# Altium PCB PCB1.PcbDoc
Units mm, origin at the board's own origin, x right, y up, seen from the top; angles counter-clockwise.
Board outline 51.41 x 51 mm, 2 copper layers (Top Layer, Bottom Layer); 43 components, 43 nets, 151 pads, 77 vias.
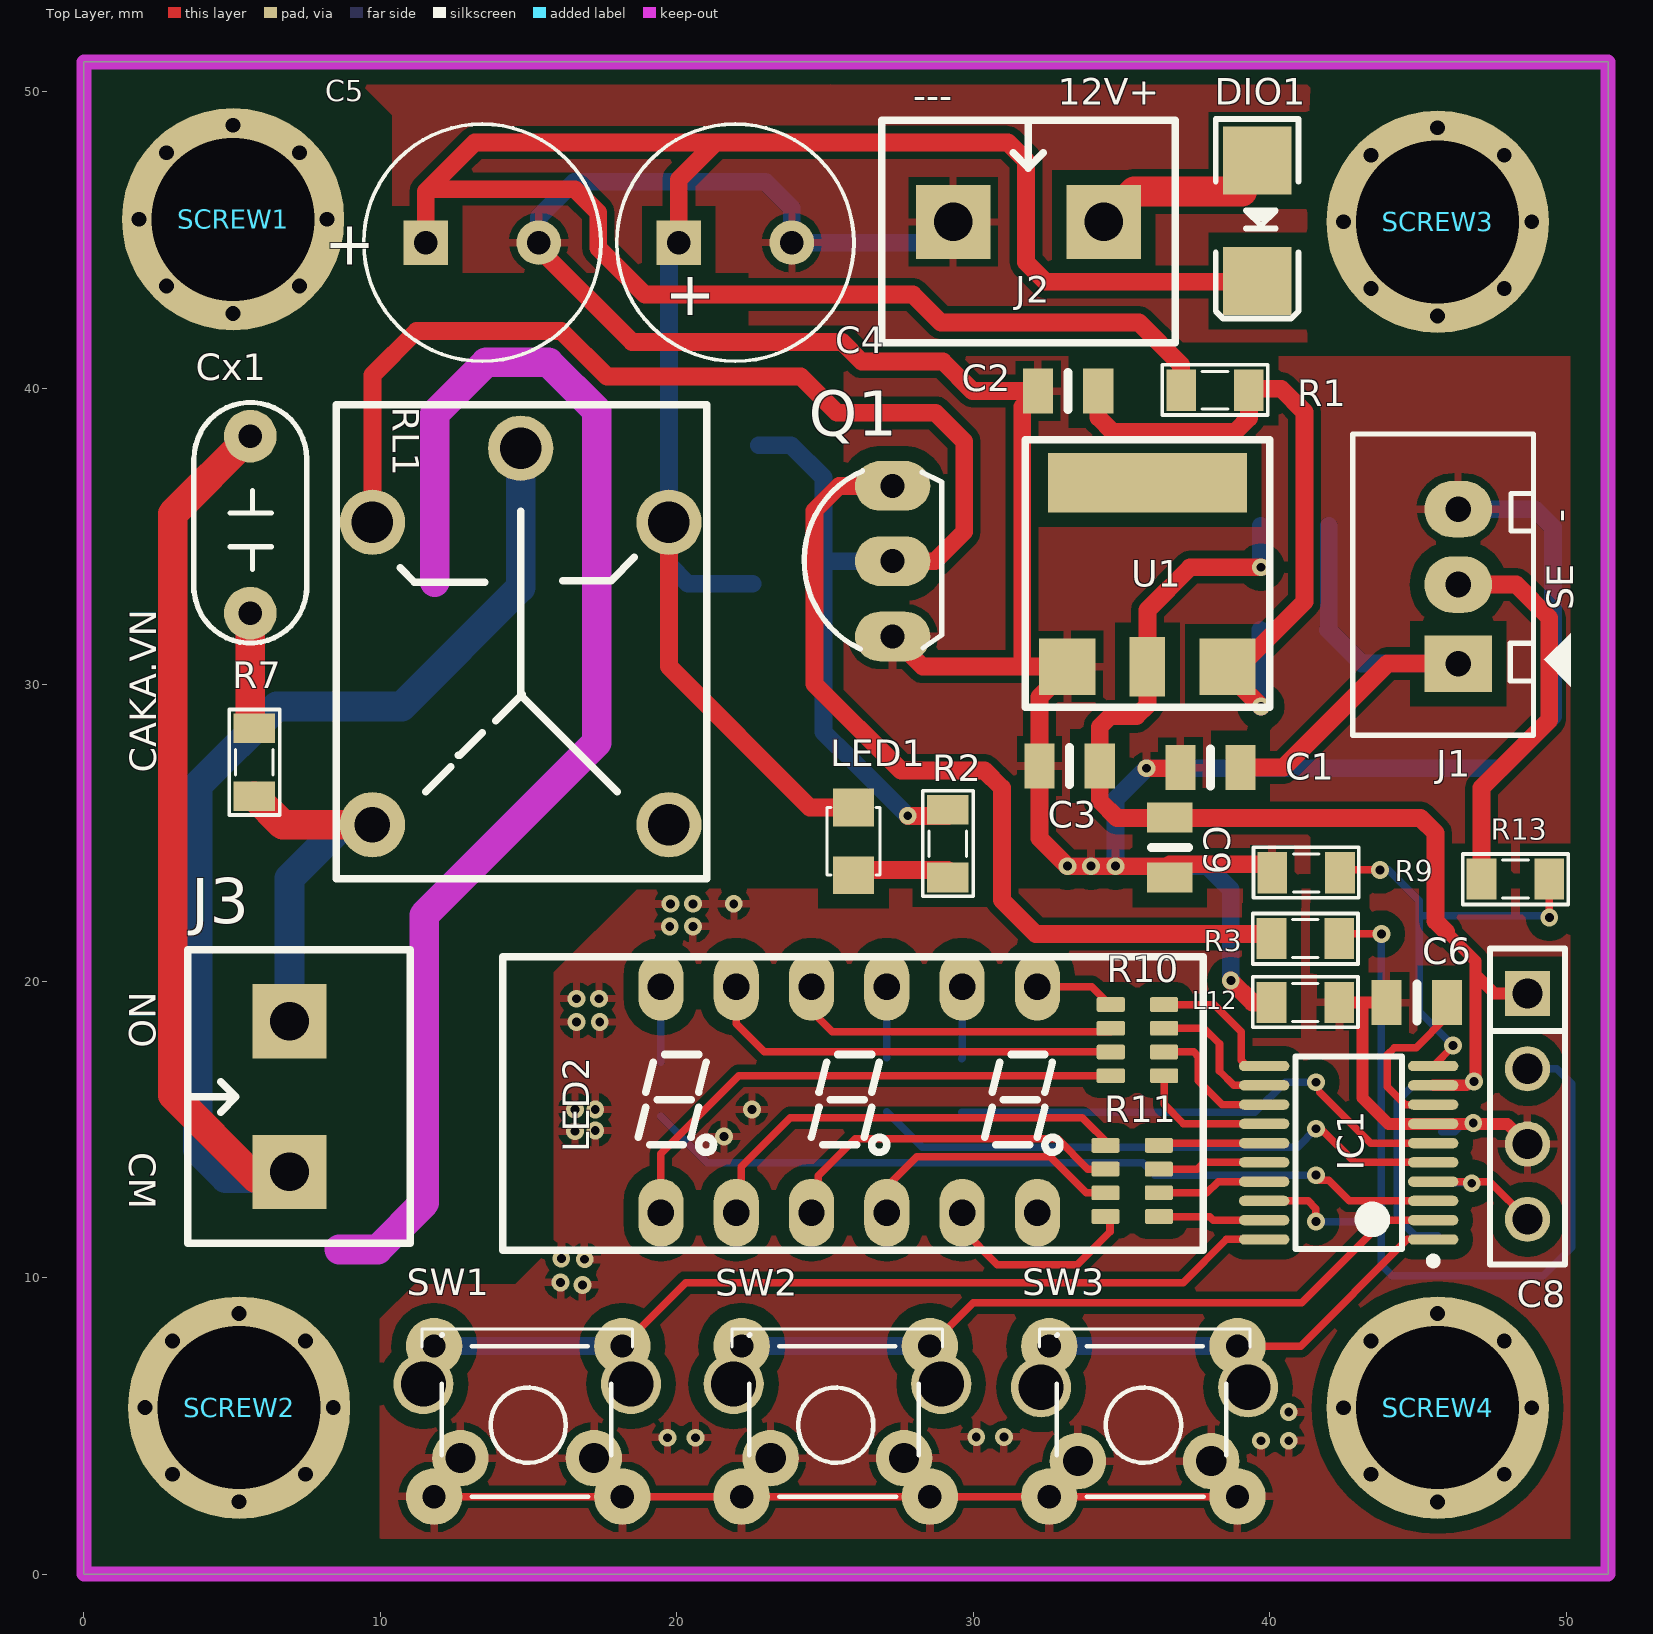
[diagram p0: Top Layer view]
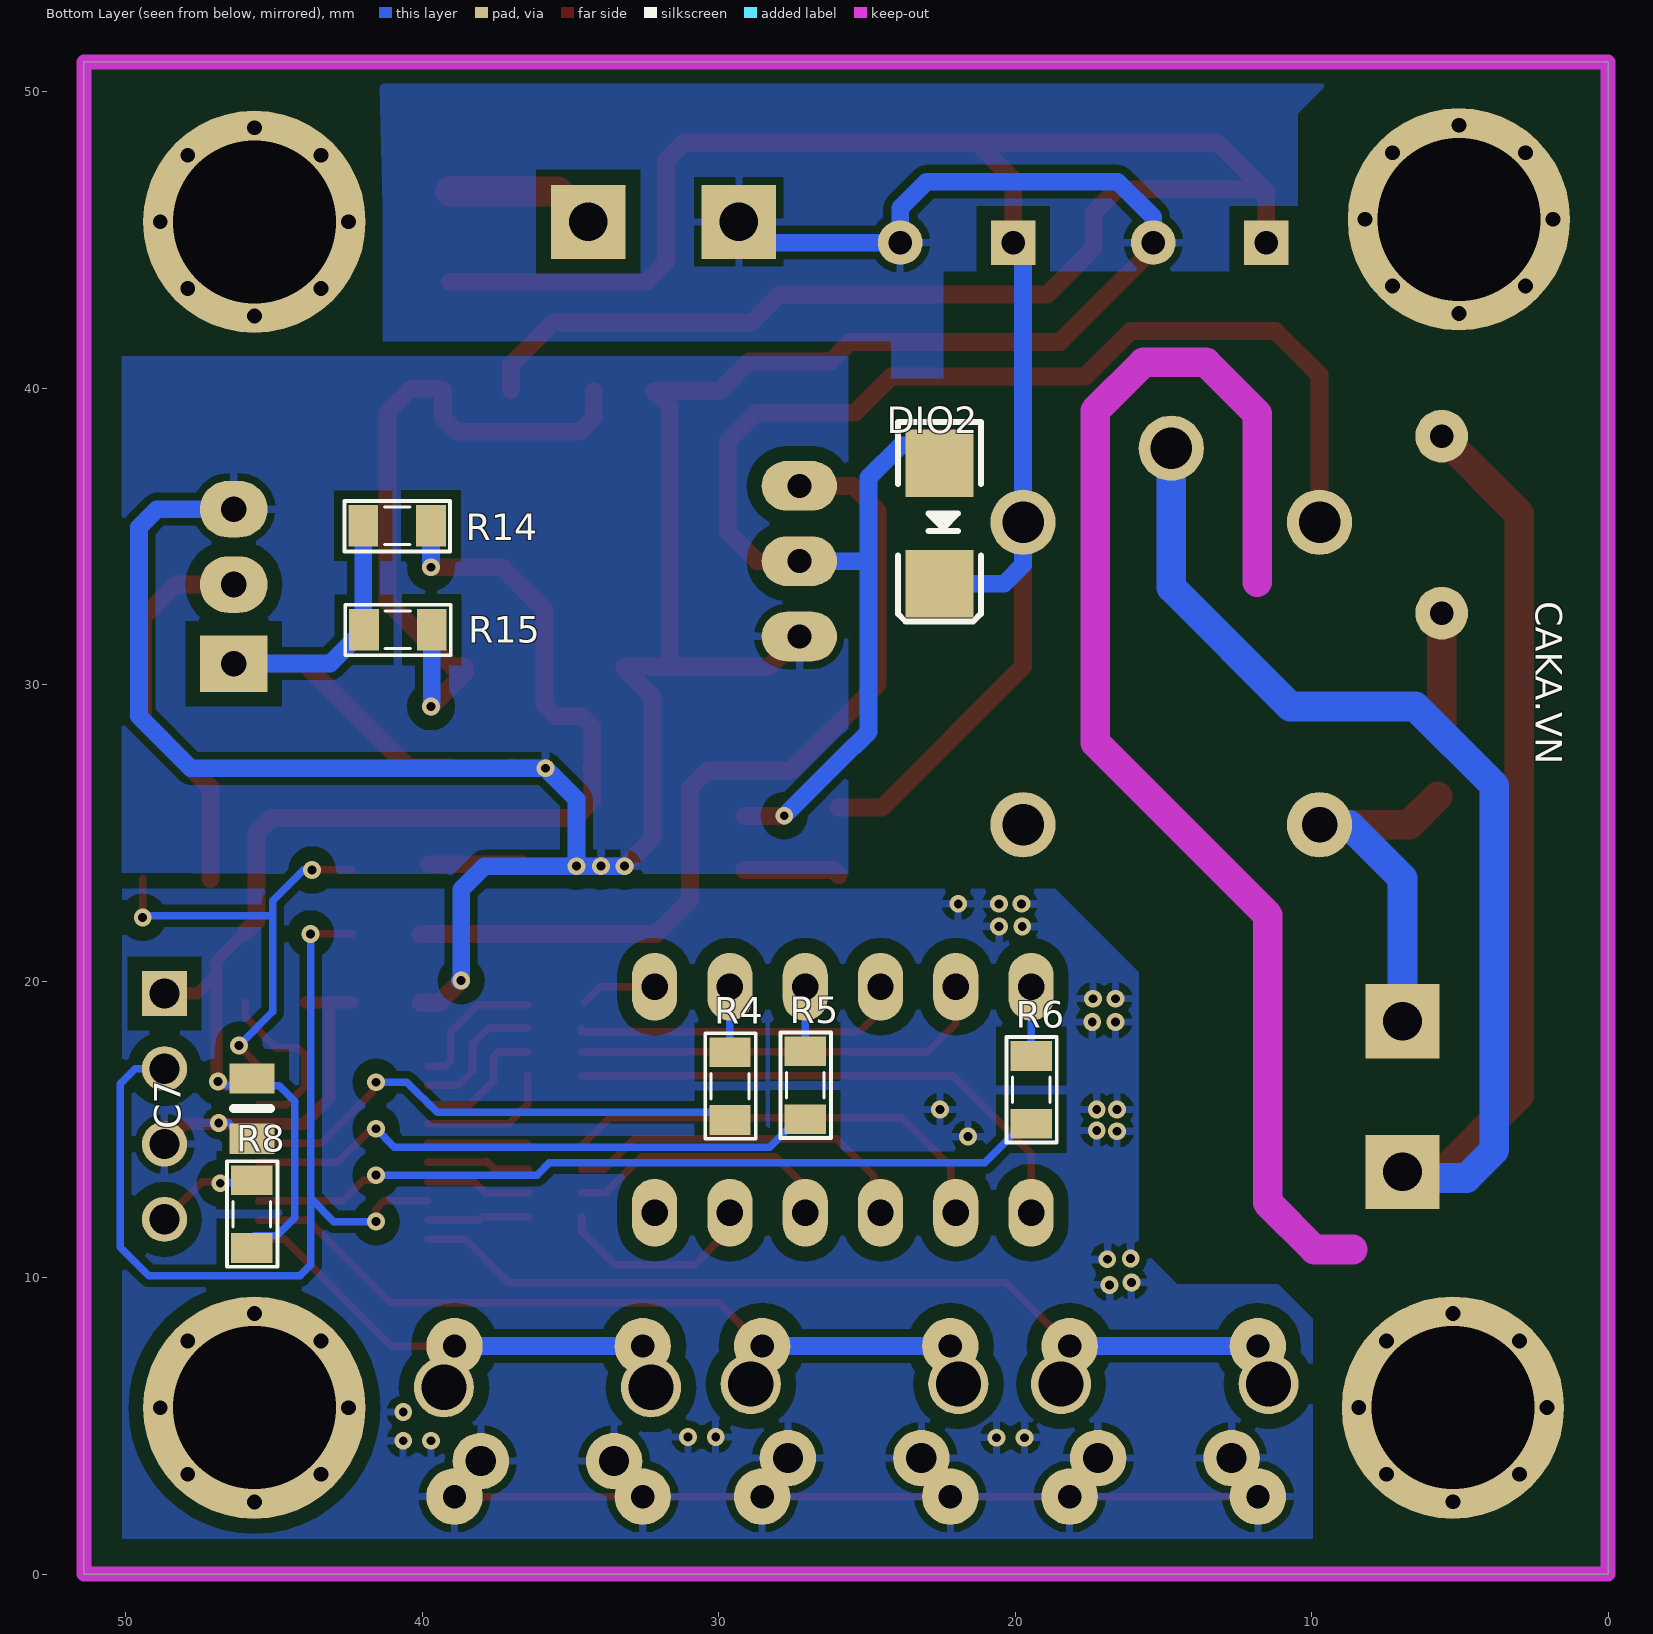
[diagram p1: Bottom Layer view, seen from below]
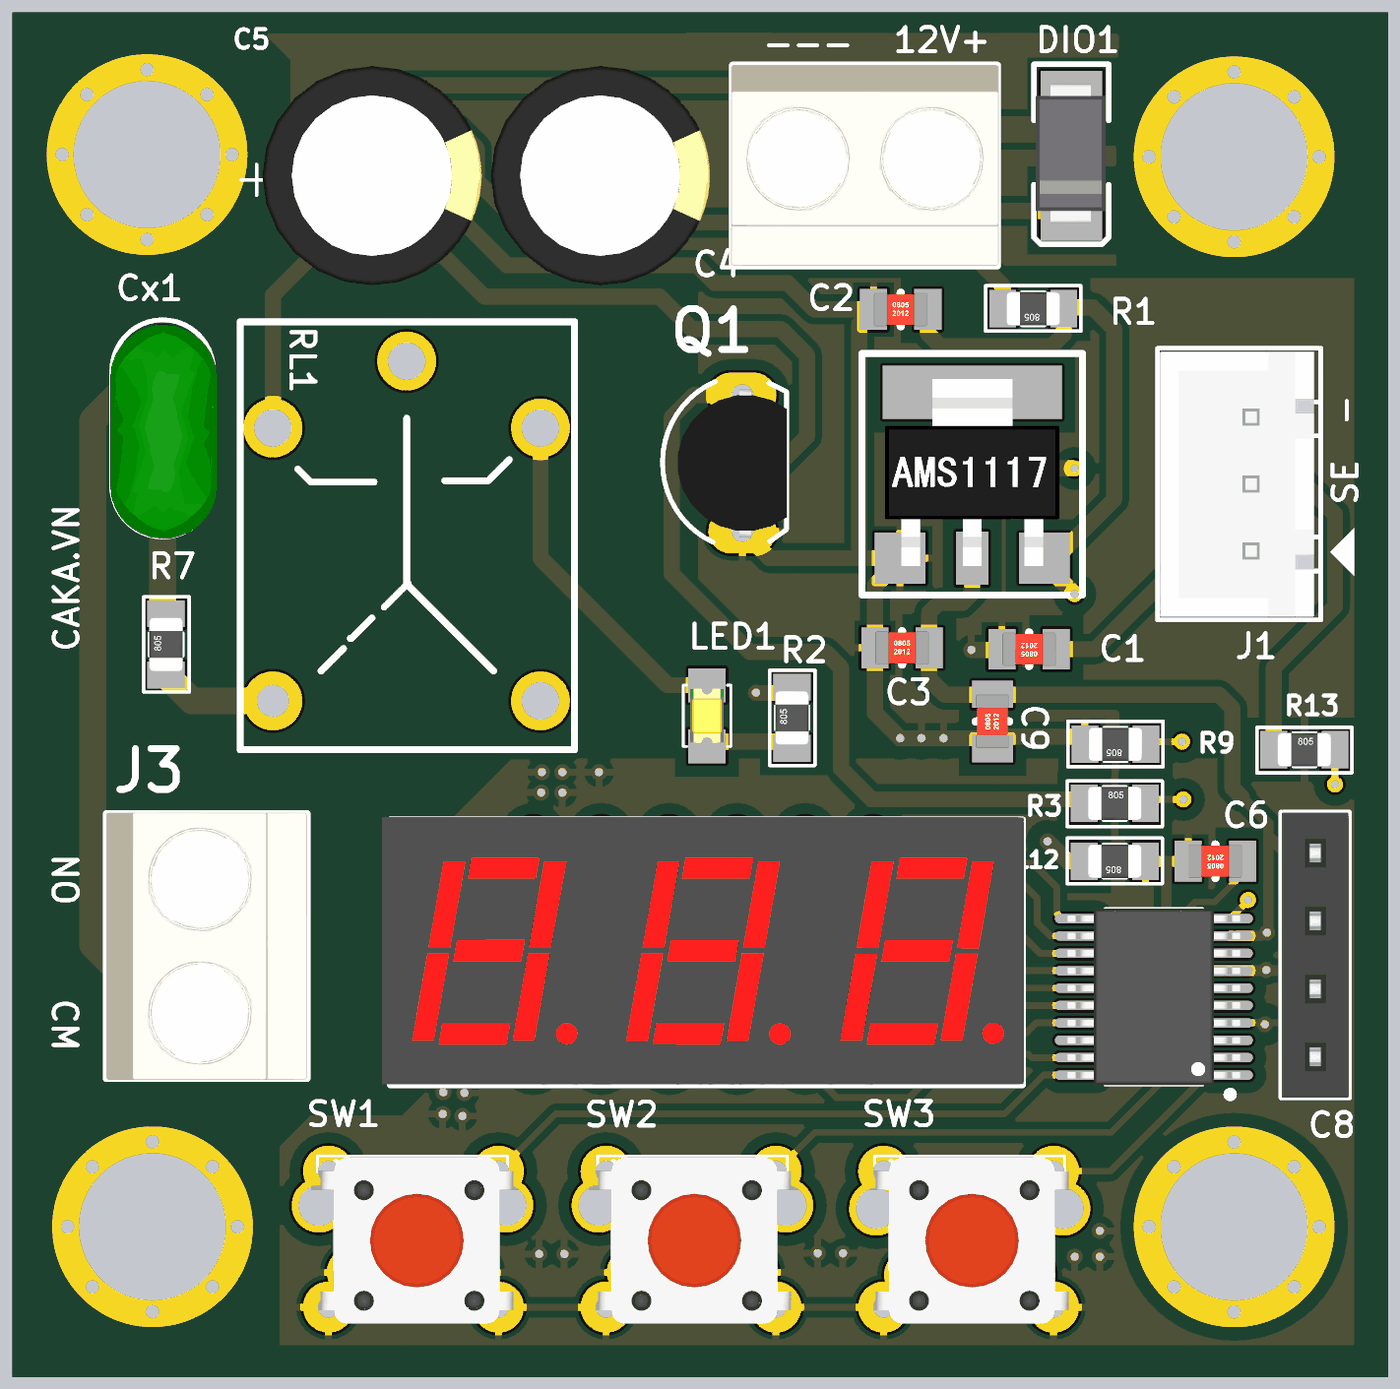
[diagram p2: 3D render of the assembled board from above, using the file's embedded part models]
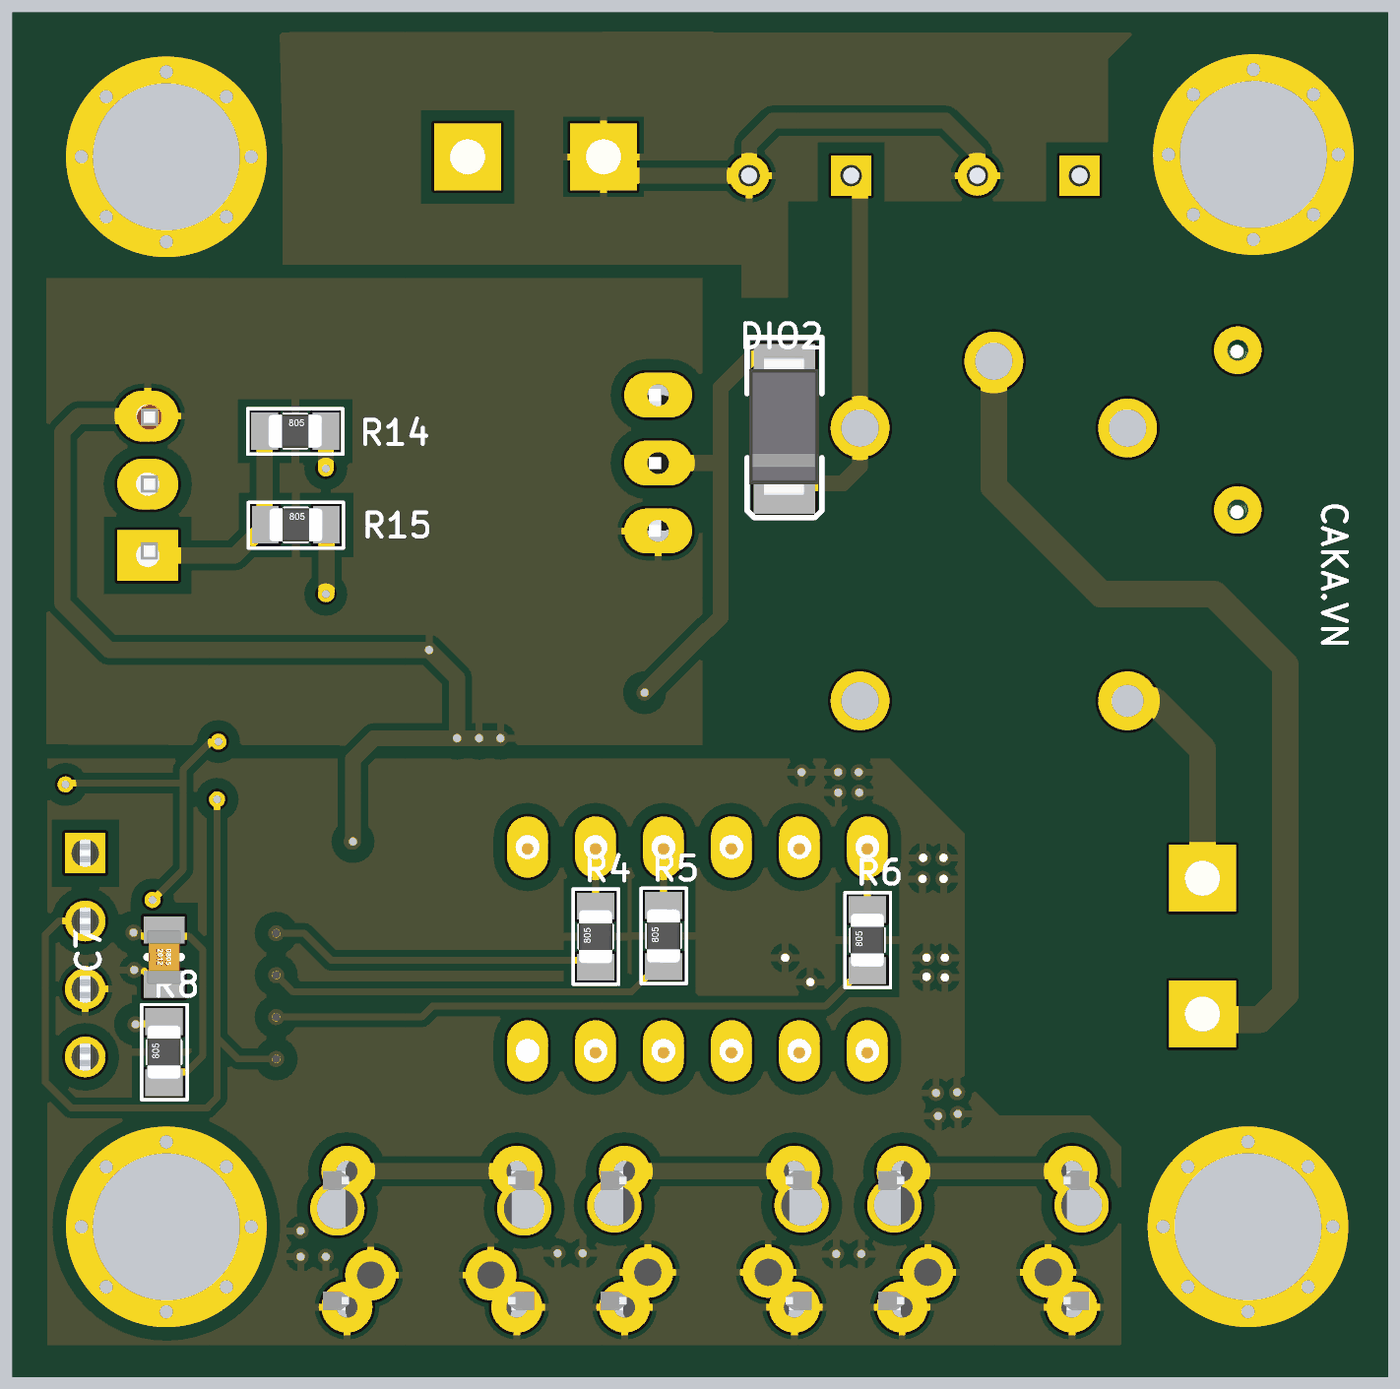
[diagram p3: 3D render of the assembled board from below, using the file's embedded part models]

## Layer stack, top to bottom
Top Solder: solder mask 0.0102, Solder Resist, Dk 3.5
Top Layer: signal copper 0.0356
Dielectric 1: dielectric 0.32, FR-4, Dk 4.8
Bottom Layer: signal copper 0.0356
Bottom Solder: solder mask 0.0102, Solder Resist, Dk 3.5

## Board outline
0,51.003 51.41,51.003 51.41,0 0,0

## Design rules (kind name [scope] priority, off if disabled: settings)
Clearance [All] p1: gap=0.254 except(0.5: SMDPad-Poly THPad-Poly Via-Poly Poly-Poly)
PolygonConnect [All] p1: connectstyle=Relief reliefconductorwidth=0.254 reliefentries=4 polygonreliefangle="90 Angle" airgapwidth=0.254
RoutingVias [All] p1: holewidth=0.3 width=0.6 viastyle="Through Hole" minholewidth=0.3 minwidth=0.6 maxholewidth=0.3 maxwidth=0.6
SolderMaskExpansion [All] p1: expansion=0.102
Width [All] p1: maxlimit=1 minlimit=0.254 preferedwidth=0.254
30 further rules are at their usual default settings.

## Components (designator, comment, footprint, x,y, rotation, side; value= is the part's Value field where it differs from the comment)
C1 "Value" SMD-0805C 37.998,27.203 r90 top
C2 "Value" SMD-0805C 33.198,39.903 r270 top
C3 "Value" SMD-0805C 33.249,27.254 r270 top
C4 "CN-ALU-DIP" CA-ALU-8 21.971,44.907 r0 top
C5 "CN-ALU-DIP" CA-ALU-8 13.437,44.907 r0 top
C6 "Value" SMD-0805C 44.958,19.279 r90 top
C7 "Value" SMD-0805C 45.745,15.697 r0 bottom
C8 "JP4" JP4-C1T 48.692,19.583 r270 top
C9 "Value" SMD-0805C 36.627,24.504 r0 top
Cx1 "XXpF" CN2.5 5.613,35.204 r90 top
DIO1 "Diode SMD" DIO-SMD-106 39.573,45.644 r90 top
DIO2 "Diode SMD" DIO-SMD-106 22.555,35.433 r90 bottom
IC1 "STM8S003F3P6" TSSOP20 42.66,14.21 r180 top locked
J1 "Header3" Header3 46.355,30.836 r90 top locked
J2 "KF2" KF2-5.08 31.86,45.61 r0 top
J3 "KF2" KF2-5.08 6.934,16.104 r90 top
L12 "100uH" RES-SMD-0805 41.199,19.279 r180 top
LED1 "LED" LED-0805-Yellow 25.959,25.857 r270 top
LED2 "LED 7 SEG 0.28 3 DIGIT" "LED 7 Seg 0.28, 3 digit, RED" 19.46,12.19 r0 top locked
Q1 "2SC1815" TO92-123 27.28,34.163 r90 top
R1 "10" RES-SMD-0805 38.151,39.929 r180 top
R2 "10k" RES-SMD-0805 29.134,24.638 r90 top
R3 "2k" RES-SMD-0805 41.199,21.438 r0 top
R4 "100" RES-SMD-0805 29.616,16.459 r90 bottom
R5 "100" RES-SMD-0805 27.076,16.485 r90 bottom
R6 "100" RES-SMD-0805 19.456,16.332 r90 bottom
R7 "Res" RES-SMD-0805 5.74,27.381 r90 top
R8 "10k" RES-SMD-0805 45.745,12.141 r90 bottom
R9 "Res" RES-SMD-0805 41.224,23.647 r180 top
R10 "RP330" RN4-0805 35.535,18.009 r180 top
R11 "RP330" RN4-0805 35.357,13.259 r180 top
R13 "Res" RES-SMD-0805 48.285,23.444 r0 top
R14 "Res" RES-SMD-0805 40.843,35.357 r180 bottom
R15 "Res" RES-SMD-0805 40.818,31.852 r180 bottom
RL1 "Relay TENGFEI" JQC-T78-DC12V-A 14.732,37.973 r270 top
SCREW1 "SCREW" SCREW-M5 5.029,45.695 r0 top
SCREW2 "SCREW" SCREW-M5 5.232,5.613 r0 top
SCREW3 "SCREW" SCREW-M5 45.66,45.61 r0 top
SCREW4 "SCREW" SCREW-M5 45.66,5.61 r0 top
SW1 "SW" SW2-DIP 18.16,2.61 r180 top
SW2 "SW" SW2-DIP 28.535,2.61 r180 top
SW3 "SW" SW2-DIP 38.91,2.61 r180 top
U1 "AMS1117-xx" SOT-233 33.172,30.607 r0 top

## Footprints (in the part's own frame and the unit in brackets; to place one, negate y for a bottom-side part, rotate by r counter-clockwise, add the part's x,y. Pads: shape width x height; smd on the part's side, far side on the other; paste and mask are expansions set on the pad)
CA-ALU-8 [mm] "Polarized capacitors, Aluminum Electrolytic Capacitors, 2-Leads, Body 8x16x3.5x0.5"
  rect 1.5x1.5 hole 0.8: 1(-1.905,0)
  round 1.5 hole 0.8: 2(1.905,0)
  silkscreen extent -4,-4 4,4, body extent -4.1,-4.1 4.1,4.1, height 14.4
CN2.5 [mil] "Tu pin to pin 250mil"
  round 70 hole 31: 1(-110,0) 2(125,0)
  silkscreen extent -150,-75 170,75, body extent -152,-80 162,77, height 539
DIO-SMD-106 [mil]
  rect 90x90.55 smd: 1(80,0) 2(-80,0)
  silkscreen extent -130,-55 135,55, body extent -99,-50 106,52, height 95
Header3 [mil] "CON 3"
  rect 75x90 hole 34: 1(-5,0)
  oval 75x90 hole 34: 2(100,0) 3(200,0)
  silkscreen extent -100,-150 300,140, body extent -95,-90 295,136, height 276
JP4-C1T [mm] "4 row, straight, gold plating"
  rect 1.52x1.52 hole 1.02: 1(0,0)
  round 1.52 hole 1.02: 2(2.54,0) 3(5.08,0) 4(7.62,0)
  silkscreen extent -1.52,-1.27 9.14,1.27, body extent -1.52,-1.25 9.14,1.25, height 8.51
JQC-T78-DC12V-A [mm]
  round 2.2 hole 1.4: 1(0,0) 2(2.5,5) 3(2.5,-5) 5(12.7,5)
  round 2.2 hole 1.2: 4(12.7,-5)
  silkscreen extent -1.47,-6.22 14.53,6.27, body extent -1.37,-6.1 14.35,6.17, height 14
KF2-5.08 [mm]
  rect 2.5x2.5 hole 1.3: 1(-2.54,0) 2(2.54,0)
  silkscreen extent -4.95,-4.08 4.95,3.43, body extent -5,-4.07 5,3.43, height 10
"LED 7 Seg 0.28, 3 digit, RED" [mil]
  oval 60x90 hole 35: 1(0,0) 2(100,0) 3(200,0) 4(300,0) 5(400,0) 6(500,0) 7(500,300) 8(400,300) 9(300,300) 10(200,300) 11(100,300) 12(0,300)
  silkscreen extent -210,-50 720,340, body extent -222,-50 722,344, height 229
LED-0805-Yellow [mil]
  rect 50x55 smd: 1(0,0) 2(90,0)
  silkscreen extent 0,-35 90,35, body extent 5,-25 85,25, height 43
RES-SMD-0805 [mil]
  rect 39.37x55 smd: 1(-45,0) 2(45,0)
  silkscreen extent -70,-34 70,33, body extent -39,-25 39,25, height 31
RN4-0805 [mm]
  round 0.254 on Mech15: 0(0,0)
  rrect25% 0.95x0.5 smd: 1(-0.9,1.2) 2(-0.9,0.4) 3(-0.9,-0.4) 4(-0.9,-1.2) 5(0.9,-1.2) 6(0.9,-0.4) 7(0.9,0.4) 8(0.9,1.2)
  Top Layer pour cut-out: -0.4,1.7 0.4,1.7 0.4,-1.7 -0.4,-1.7
  body extent -0.87,-1.68 0.88,1.67, height 0.7
SCREW-M5 [mm]
  round 7.5 hole 5.5 mask+0: 1(0,0)
SMD-0805C [mil]
  rect 60x40 smd: 1(0,40) 2(0,-40)
  silkscreen extent -25,0 25,0, body extent -25,-39 25,39, height 35
SOT-233 [mm] "SOT-233"
  rect 1.9x1.9 smd: 1(0,0) 3(5.4,0)
  rect 1.2x2 smd: 2(2.7,0)
  rect 6.7x2 smd: 4(2.7,6.2)
  silkscreen extent -1.43,-1.38 6.83,7.65, body extent -0.55,-0.3 5.95,6.7, height 1.85
SW2-DIP [mil] "SW button 4pin, 250 x250 mil"
  round 75 hole 31: 1(0,0) 2(0,-200) 3(250,-200) 4(250,0)
  silkscreen extent 15,-215 240,0, body extent -36,-220 276,24, height 276
TO92-123 [mil] "TO-92"
  oval 66x100 hole 32: 1(-100,0) 2(0,0) 3(100,0)
  silkscreen extent -117,-65 120,118, body extent -109,-66 109,95, height 245
TSSOP20 [mm] "TSSOP, 20-Leads, Body 6.50x4.40mm, Pitch 0.65mm, IPC High Density"
  oval 1.7x0.35 smd: 1(-2.85,2.925) 2(-2.85,2.275) 3(-2.85,1.625) 4(-2.85,0.975) 5(-2.85,0.325) 6(-2.85,-0.325) 7(-2.85,-0.975) 8(-2.85,-1.625) 9(-2.85,-2.275) 10(-2.85,-2.925) 11(2.85,-2.925) 12(2.85,-2.275) 13(2.85,-1.625) 14(2.85,-0.975) 15(2.85,-0.325) 16(2.85,0.325) 17(2.85,0.975) 18(2.85,1.625) 19(2.85,2.275) 20(2.85,2.925)
  silkscreen extent -2.98,-3.25 1.8,3.77, body extent -3.23,-3.3 3.23,3.3, height 1.25

## Part data
C1 C2 C3 C6 C7 C9: library part CAPACITOR, "CAP MLCC SMT"
C4 C5: "Capacitor (Semiconductor SIM Model)"
C8: "WR-PHD 2.54 mm Angled Socket Header"
Cx1: library part CN
DIO1 DIO2: "Default Diode"
IC1: "MCU 8BIT  8KB FLASH TSSOP-20"
J1: "Header IDC, 3 x 1 Pin Vertical 2.54mm Pitch (Non-Boxed, Male)"
L12 R1 R2 R3 R4 R5 R6 R7 R8 R9 R13 R14 R15: library part Res-SMD, "Resistor"
LED1: library part "LED SMD"
LED2: library part "LED 7 Segment"
Q1: "NPN 600mW, ECB"
R10 R11: library part RN4-Dual
SW1 SW2 SW3: library part SW4, "Switch button 4 pin"

## Free pads (board coordinates)
  round 1.905 hole 1.016: 1(12.7,3.912) 1(23.165,3.912) 1(33.528,3.81) 2(17.2,3.912) 2(27.665,3.912) 2(38.024,3.81)
  round 2.032 hole 1.524: ""(11.45,6.412) ""(18.45,6.412) ""(21.915,6.412) ""(28.915,6.412) ""(32.283,6.299) ""(39.268,6.299)

## Via types
v1: diameter 0.6, hole 0.3, Top Layer to Bottom Layer, tented both sides, 39 vias
v2: diameter 0.5, hole 0.5, Top Layer to Bottom Layer, 32 vias
v3: diameter 0.6, hole 0.3, Top Layer to Bottom Layer, 6 vias

## Nets (pads, with @x,y where several pads share a name; then routed paths per layer and width w, separated by ;. In a path a pad name is that pad's centre, name@x,y a point inside that pad or via, vN(x,y) a via of type N, cw(c..) or ccw(c..) an arc to the next point about the centre after c; other vN are vias at no path point)
12V: C2.1 R1.1 R15.2 U1.3 | length 23.9
  Top Layer w0.6: C2.1 34.214,39.014 34.696,38.532 38.837,38.532 39.294,38.989 R1.1 39.345,39.98 40.386,39.98 41.173,39.192 41.173,32.791 38.989,30.607 U1.3 38.572,30.389 v3(39.7,29.261)
  Bottom Layer w0.6: R15.2 39.675,29.261 v3(39.7,29.261)
A_7: IC1.13 R10.2 | length 4.6
  Top Layer w0.254: R10.2 37.433,17.609 37.592,17.45 37.592,16.637 38.394,15.835 IC1.13
B_7: IC1.12 R10.3 | length 4.7
  Top Layer w0.254: R10.3 37.776,18.409 38.303,17.882 38.303,16.967 38.786,16.485 IC1.12
BT1: IC1.20 pad.@11.45,6.412 pad.@18.45,6.412 SW1.2 SW1.3 | length 29.5
  Top Layer w0.254: SW1.2 20.301,9.83 37.084,9.83 38.539,11.285 IC1.20
  Bottom Layer w0.6: SW1.3 SW1.2
BT2: IC1.2 pad.@21.915,6.412 pad.@28.915,6.412 SW2.2 SW2.3 | length 25.1
  Top Layer w0.254: SW2.2 29.99,9.144 41.072,9.144 43.862,11.935 IC1.2
  Bottom Layer w0.6: SW2.3 SW2.2
BT3: IC1.1 pad.@32.283,6.299 pad.@39.268,6.299 SW3.2 SW3.3 | length 14.6
  Top Layer w0.254: SW3.2 41.04,7.69 44.635,11.285 IC1.1
  Bottom Layer w0.254: SW3.2@38.754,7.69 SW3.2
  Bottom Layer w0.6: SW3.3 38.754,7.69 SW3.2@38.862,7.798
C_7: IC1.17 R11.2 | length 3.6
  Top Layer w0.254: R11.2@36.409,12.859 37.878,12.859 38.254,13.235 IC1.17
D_7: IC1.15 R11.4 | length 3.4
  Top Layer w0.254: R11.4@36.409,14.459 36.485,14.535 IC1.15
DIG1: IC1.3 R6.1 | length 27.1
  Top Layer w0.254: v1@41.656,13.284 41.986,13.284 42.686,12.585 IC1.3
  Bottom Layer w0.254: R6.1@19.456,15.443 21.031,13.868 35.712,13.868 36.127,13.454 v1(41.554,13.454)
DIG2: IC1.5 R5.1 | length 19.4
  Top Layer w0.254: v1@41.758,14.986 42.859,13.885 IC1.5
  Bottom Layer w0.254: R5.1@27.076,15.596 28.27,14.402 40.936,14.402 v1(41.554,15.02)
DIG3: IC1.6 R4.1 | length 16.9
  Top Layer w0.254: 41.681,16.256 43.403,14.535 IC1.6
  Bottom Layer w0.254: R4.1@29.616,15.57 39.497,15.57 40.513,16.586 v1(41.554,16.586)
DP: IC1.16 R11.3 | length 3.5
  Top Layer w0.254: R11.3@36.409,13.659 37.56,13.659 37.821,13.919 37.855,13.885 IC1.16
E_7: IC1.14 R10.1 | length 4.6
  Top Layer w0.254: R10.1 36.435,15.839 37.089,15.185 IC1.14
F_7: IC1.11 R10.4 | length 4.8
  Top Layer w0.254: R10.4 38.119,19.209 39.04,18.288 39.04,17.323 39.228,17.135 IC1.11
G_7: IC1.19 R11.1 | length 3.5
  Top Layer w0.254: R11.1@36.409,12.059 37.967,12.059 38.091,11.935 IC1.19
GND: C1.1 C2.2 C3.2 C4.2 C5.2 C9.2 J1.3 J2.1 L12.2 Q1.1 R9.2 U1.1 | length 105.5
  Top Layer w0.6: C5.2 15.342,44.704 18.491,41.554 25.578,41.554 26.238,40.894 28.981,40.894 29.972,39.903 C2.2 31.648,39.37 31.648,30.607 ; Q1.1 28.296,30.607 31.648,30.607 ; U1.1@33.14,30.49 32.233,29.582 C3.2 32.233,24.816 v1(33.172,23.876) v1(33.972,23.876) v1(34.798,23.876) 36.564,23.876 36.627,23.939 R9.2@39.789,23.939 ; U1.1 31.648,30.607 ; v1(35.839,27.178) 36.957,27.178 C1.1 ; v1(38.684,20.015) 39.421,19.279 L12.2
  Bottom Layer w0.6: C5.2 15.342,45.771 16.535,46.965 22.987,46.965 23.876,46.076 C4.2 J2.1@28.618,44.907 ; v1(33.172,23.876) v1(33.972,23.876) v1(34.798,23.876) ; v1@38.735,20.015 v1(38.684,20.015) 38.684,23.089 37.897,23.876 v1(34.798,23.876) ; J1.3@46.355,36.563 J1.3 48.946,35.916 49.555,35.306 49.555,28.931 47.803,27.178 v1(35.839,27.178) 34.798,26.137 v1(34.798,23.876)
"GND MCU": C6.1 C7.1 C8.3 IC1.7 L12.1 pad.1 pad.2 SW1.1 SW1.4 SW2.1 SW2.4 SW3.1 SW3.4 | length 39.3
  Top Layer w0.254: SW1.4 SW1.1 SW2.4 SW2.1 SW3.4 SW3.1
  Top Layer w0.4: L12.1 43.129,19.279 ; C6.1 43.129,19.279 ; C8.3 48.011,15.185 IC1.7 43.997,15.185 43.129,16.053 43.129,19.279
  Bottom Layer w0.254: C7.1@45.796,14.922 46.24,14.922 46.533,15.215 v1(46.863,15.215)
  other v1: 39.7,4.496 40.64,4.496 19.685,4.597 20.625,4.597 30.099,4.623 31.039,4.623 40.64,5.461 16.815,9.754 16.078,9.83 16.891,10.617 16.104,10.643 21.59,14.757 16.561,14.935 17.247,14.961 16.561,15.672 17.247,15.672 22.53,15.672 16.612,18.618 17.399,18.618 16.612,19.406 17.374,19.406 19.761,21.844 20.549,21.844 19.787,22.606 20.549,22.606 21.92,22.606
"MCU RESET": C8.4 IC1.4 R8.2 | length 4.9
  Top Layer w0.254: IC1.4 47.421,13.235 C8.4
  Bottom Layer w0.254: R8.2@45.695,13.195 46.901,13.195 v1@46.914,13.183
  other v1: 46.812,13.183
NetC1_2: C1.2 J1.1 R14.1 R15.1 | length 17.2
  Top Layer w0.6: C1.2 40.462,27.203 43.967,30.709 J1.1
  Bottom Layer w0.6: R14.1 41.986,31.877 R15.1 43.104,30.709 J1.1
NetC6_2: C6.2 IC1.8 | length 5.9
  Top Layer w0.254: IC1.8 44.567,15.835 43.96,16.441 43.96,17.51 44.205,17.755 44.933,17.755 45.974,18.796 C6.2
NetCx1_1: Cx1.1 R7.2 | length 3.9
  Top Layer w1: Cx1.1 5.613,28.651 R7.2
NetCx1_2: Cx1.2 J3.1 RL1.1 | length 62.5
  Top Layer w1: Cx1.2 2.997,35.763 2.997,16.154 5.791,13.36 J3.1@6.934,13.36
  Bottom Layer w1: J3.1@6.934,13.36 4.775,13.36 3.835,14.3 3.835,26.594 6.502,29.261 10.719,29.261 14.732,33.274 RL1.1
NetDIO2_1: DIO2.1 Q1.2 R2.2 RL1.3 | length 51.9
  Top Layer w0.6: RL1.3 9.732,40.441 11.214,41.923 16.108,41.923 17.641,40.39 24.177,40.39 25.4,39.167 28.727,39.167 29.693,38.202 29.693,35.154 28.702,34.163 Q1.2 ; v1(27.788,25.578) 27.801,25.565 R2.2@29.134,25.565
  Bottom Layer w0.6: DIO2.1@22.758,38.075 23.851,38.075 24.943,36.982 24.943,34.163 ; Q1.2 24.943,34.163 ; v1(27.788,25.578) 25.425,27.94 25.4,27.94 24.943,28.397 24.943,34.163
NetJ1_2: J1.2 R13.1 | length 13.3
  Top Layer w0.6: J1.2 48.311,33.376 49.428,32.258 49.428,28.804 47.142,26.518 R13.1
NetJ3_2: J3.2 R7.1 RL1.4 | length 13
  Top Layer w1: R7.1 6.706,25.273 RL1.4
  Bottom Layer w1: J3.2@6.934,18.44 6.934,23.47 8.738,25.273 RL1.4
NetLED1_2: LED1.2 R2.1 | length 3.2
  Top Layer w0.6: LED1.2 26.137,23.749 R2.1@29.134,23.749
NetLED2_1: LED2.1 R10.8 | length 18.3
  Top Layer w0.254: LED2.1 19.46,14.177 22.092,16.809 R10.8
NetLED2_2: LED2.2 R11.5 | length 15.1
  Top Layer w0.254: LED2.2 22.174,12.363 22.174,13.741 23.825,15.392 33.676,15.392 R11.5@34.609,14.459
NetLED2_3: LED2.3 R11.6 | length 12.1
  Top Layer w0.254: LED2.3 24.765,12.414 24.765,13.437 26.01,14.681 32.842,14.681 33.865,13.659 R11.6@34.609,13.659
NetLED2_4: LED2.4 R11.7 | length 9.3
  Top Layer w0.254: LED2.4 27.08,13.06 28.092,14.072 32.588,14.072 33.801,12.859 R11.7@34.609,12.859
NetLED2_5: LED2.5 R11.8 | length 7
  Top Layer w0.254: LED2.5 29.62,11.629 30.81,10.439 33.503,10.439 34.609,11.546 R11.8@34.609,12.059
NetLED2_7: LED2.7 R10.5 | length 2.6
  Top Layer w0.254: LED2.7 33.988,19.81 R10.5@34.519,19.279
NetLED2_8: LED2.8 R4.2 | length 2.5
  Bottom Layer w0.254: R4.2@29.617,17.386 29.62,17.39 LED2.8 LED2.8@29.62,19.923
NetLED2_9: LED2.9 R5.2 | length 2.8
  Bottom Layer w0.254: R5.2@27.077,17.411 27.08,17.415 LED2.9 LED2.9@27.08,20.19
NetLED2_10: LED2.10 R10.6 | length 11.3
  Top Layer w0.254: LED2.10 24.54,18.995 25.248,18.288 26.605,18.288 26.607,18.286 34.635,18.286 R10.6
NetLED2_11: LED2.11 R10.7 | length 14.3
  Top Layer w0.254: LED2.11 22,18.563 22.955,17.609 R10.7
NetLED2_12: LED2.12 R6.2 | length 2.6
  Bottom Layer w0.254: R6.2@19.457,17.259 19.46,17.263 LED2.12
NetQ1_3: Q1.3 R3.1 | length 30
  Top Layer w0.6: Q1.3 25.476,36.703 24.638,35.865 24.638,30.023 27.559,27.102 30.378,27.102 30.963,26.518 30.963,22.733 32.106,21.59 R3.1@40.056,21.59
SWIM: C8.2 IC1.18 R3.2 | length 32
  Top Layer w0.254: IC1.18 41.289,12.585 41.554,12.319 v1(41.554,11.887) ; R3.2@42.342,21.59 v3(43.764,21.59)
  Bottom Layer w0.254: v1(41.554,11.887) 42.977,11.887 43.764,12.675 ; v3(43.764,21.59) 43.764,12.675 ; C8.2@48.283,17.043 C8.2 49.682,17.043 50.19,16.535 50.19,11.024 49.225,10.058 44.12,10.058 44.12,10.084 43.764,10.439 43.764,12.675
TRIGGER: IC1.10 R9.1 R13.2 | length 15.4
  Top Layer w0.254: R9.1@42.367,23.749 v3(43.713,23.749) ; IC1.10 46.203,17.827 46.199,17.831 v3(46.177,17.831) 46.203,17.856 v3@46.203,17.983 ; R13.2 v3(49.428,22.149) v3@49.454,22.123
  Bottom Layer w0.254: v3(43.713,23.749) 43.993,23.749 45.034,22.708 45.034,22.2 ; v3(46.177,17.831) 45.034,18.974 45.034,22.2 ; v3(49.428,22.149) 49.378,22.2 45.034,22.2
VCC: C3.1 C7.2 C8.1 C9.1 IC1.9 R8.1 R14.2 U1.2 | length 45.8
  Top Layer w0.4: IC1.9 v1@46.634,16.485 ; 45.949,21.666 46.939,20.676 46.939,20.218 ; v1@46.838,16.688 46.939,16.789 46.939,20.218 ; C8.1 47.574,19.583 46.939,20.218
  Top Layer w0.6: C3.1@34.315,27.203 C3.1 ; v3(39.7,33.96) 37.313,33.96 35.872,32.52 U1.2 35.872,29.304 35.499,28.931 34.62,28.931 34.265,28.575 C3.1 ; 45.949,21.666 45.593,22.022 45.593,24.994 45.085,25.502 34.849,25.502 34.265,26.086 C3.1
  Bottom Layer w0.254: R8.1@45.695,11.379 45.669,11.405 44.907,11.405 44.298,12.014 44.298,15.951 44.819,16.472 46.597,16.472 46.736,16.612 v1(46.888,16.612)
  Bottom Layer w0.6: v3(39.7,33.96) R14.2
"VCC RL": C4.1 C5.1 DIO1.2 DIO2.2 LED1.1 R1.2 RL1.2 | length 94.4
  Top Layer w0.6: C5.1 11.532,46.634 11.608,46.711 ; RL1.2 19.732,30.611 24.486,25.857 LED1.1 ; C4.1 20.066,47.041 21.311,48.285 ; R1.2 37.008,40.792 35.585,42.215 28.905,42.215 27.965,43.155 18.923,43.155 17.348,44.729 17.348,45.923 16.561,46.711 11.608,46.711 ; DIO1.2@39.06,43.586 32.437,43.586 31.775,44.247 31.775,47.676 31.166,48.285 21.311,48.285 ; 11.608,46.711 13.183,48.285 21.311,48.285
  Bottom Layer w0.6: C4.1 19.732,44.573 RL1.2 19.732,34.04 20.371,33.401 DIO2.2
VIN: DIO1.1 J2.2 | length 5.1
  Top Layer w1: J2.2 35.424,46.634 DIO1.1@39.06,46.634
pads on no net: LED2.6 R10.0 R11.0 RL1.5 SCREW1.1 SCREW2.1 SCREW3.1 SCREW4.1 U1.4
copper on no net:
  other v2: 5.232,2.438 45.66,2.435 2.987,3.368 7.477,3.368 43.415,3.365 47.905,3.365 2.057,5.613 8.407,5.613 42.485,5.61 48.835,5.61 2.987,7.858 7.477,7.858 43.415,7.855 47.905,7.855 5.232,8.788 45.66,8.785 45.66,42.435 5.029,42.52 43.415,43.365 47.905,43.365 2.784,43.45 7.274,43.45 42.485,45.61 48.835,45.61 1.854,45.695 8.204,45.695 43.415,47.855 47.905,47.855 2.784,47.94 7.274,47.94 45.66,48.785 5.029,48.87

## Polygon pours and split planes (outlines as drawn)
GND on Top Layer "GND_L02_P008" (solid, pour order 12): 25.179,50.254 25.153,50.228 9.38,50.228 10.396,49.212 10.396,43.675 10.396,43.624 9.126,42.354 17.635,42.354 18.448,41.542 18.448,40.297 21.242,40.297 24.106,40.297 24.106,41.542 41.257,41.542 41.257,46.063 41.359,50.228
GND on Top Layer "GND_L02_P006" (solid, pour order 10): 50.14,23.647 50.14,41.072 25.629,41.072 25.629,23.526
"GND MCU" on Top Layer "GND_MCU_L01_P002" (solid, pour order 2): 18.669,23.114 15.85,20.295 15.85,11.252 15.85,11.074 15.037,10.262 14.554,9.779 11.151,9.779 10.084,8.712 9.982,8.611 9.982,2.388 9.982,1.168 10.008,1.194 25.705,1.194 50.14,1.194 50.14,23.114
GND on Bottom Layer "GND_L02_P008" (solid, pour order 8): 25.248,50.292 25.222,50.267 9.449,50.267 10.465,49.251 10.465,43.713 10.465,43.663 9.195,42.393 17.704,42.393 18.517,41.58 18.517,40.335 21.311,40.335 24.175,40.335 24.175,41.58 41.326,41.58 41.326,46.101 41.427,50.267
GND on Bottom Layer "GND_L02_P006" (solid, pour order 6): 50.14,23.647 50.14,41.072 25.629,41.072 25.629,23.526
"GND MCU" on Bottom Layer "GND_MCU_L02_P000" (solid, pour order 0): 18.644,23.114 15.824,20.295 15.824,11.252 15.824,11.074 15.011,10.262 14.529,9.779 11.125,9.779 10.058,8.712 9.957,8.611 9.957,2.388 9.957,1.168 9.982,1.194 25.679,1.194 50.114,1.194 50.114,23.114

## Keep-outs
Keep-Out Layer:
  lines w0.5: 0,0 0,51.003 51.41,51.003 51.41,0 0,0
  lines w1: 8.611,10.947 9.906,10.947 11.481,12.522 11.481,22.225 17.297,28.042 17.297,39.243 15.672,40.869 13.564,40.869 11.836,39.141 11.836,33.452

## Other copper
Top Layer:
  pour cut-out: 0.838,35.484 0.838,38.76 0.838,43.891 9.83,43.891 22.428,43.891 22.428,24.455 20.96,22.987 20.859,23.089 15.367,23.089 13.31,21.031 13.31,11.252 11.887,11.252 10.185,9.55 8.915,10.82 0.838,10.82
Bottom Layer:
  pour cut-out: 0.838,35.535 0.838,38.811 0.838,43.942 9.83,43.942 22.428,43.942 22.428,24.506 20.96,23.038 20.859,23.139 15.367,23.139 13.31,21.082 13.31,11.303 11.887,11.303 10.185,9.601 8.915,10.871 0.838,10.871

## Silkscreen, mask and mechanical layers (free items; w line width, h text height)
Top Overlay:
  lines w0.102: 11.4,7.662 11.4,8.262 14.95,8.262 18.5,8.262 18.5,7.662 ; 21.865,7.662 21.865,8.262 25.415,8.262 28.965,8.262 28.965,7.662 ; 32.228,7.662 32.228,8.262 35.778,8.262 39.328,8.262 39.328,7.662
  text "12V+" at 32.842,49.555 h0.9
  text "---" at 27.965,49.428 h0.9
  text "-" at 50.216,35.484 h0.9 r90
  text "SE" at 50.241,32.512 h0.9 r90
  text "CAKA.VN" at 2.438,27.026 h0.9 r90
  text "NO" at 1.524,19.634 h0.9 r270
  text "CM" at 1.524,14.224 h0.9 r270
Bottom Overlay:
  text "CAKA.VN" at 2.438,32.817 h0.9 r90

## Text inside footprints (layer, text, board x,y; h text height)
C4: Top Overlay "+" at 19.599,42.466 h1.5
C5: Top Overlay "+" at 8.112,44.17 h1.5